# Altium PCB PCB1.PcbDoc
Units mm, origin at the board's own origin, x right, y up, seen from the top; angles counter-clockwise.
Board outline 35 x 35 mm, 4 copper layers (Top Layer, POWER, GND, Bottom Layer), stack 0.603 mm thick; 9 components, 5 nets, 86 pads, 0 vias.
Unrouted connection lines stored in the file: 17.
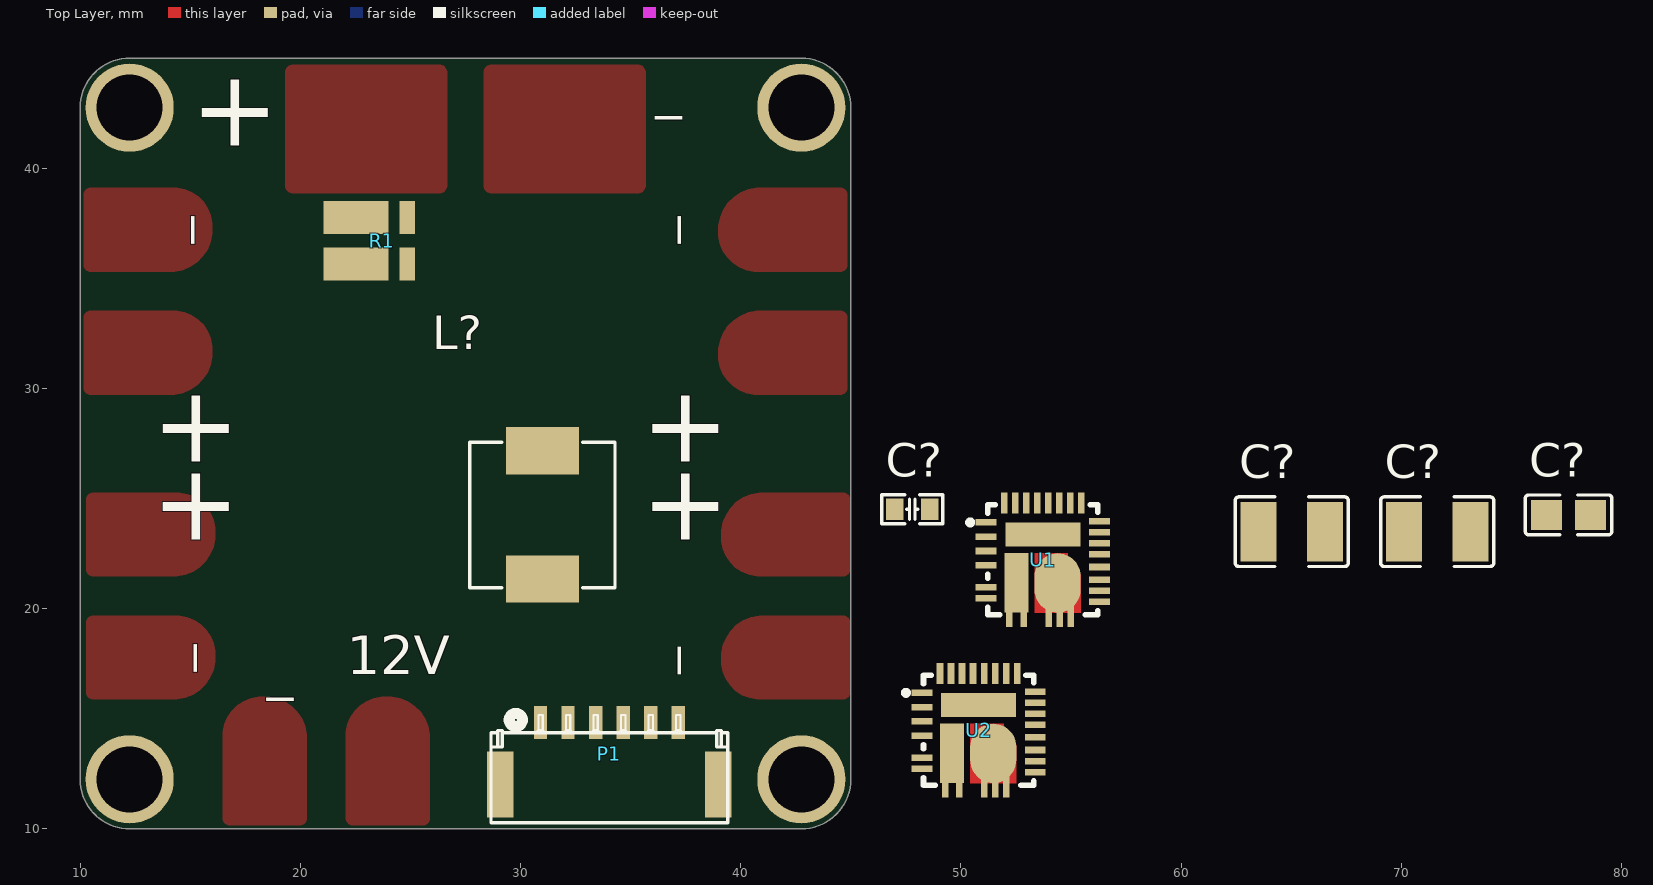
[diagram p0: Top Layer view]
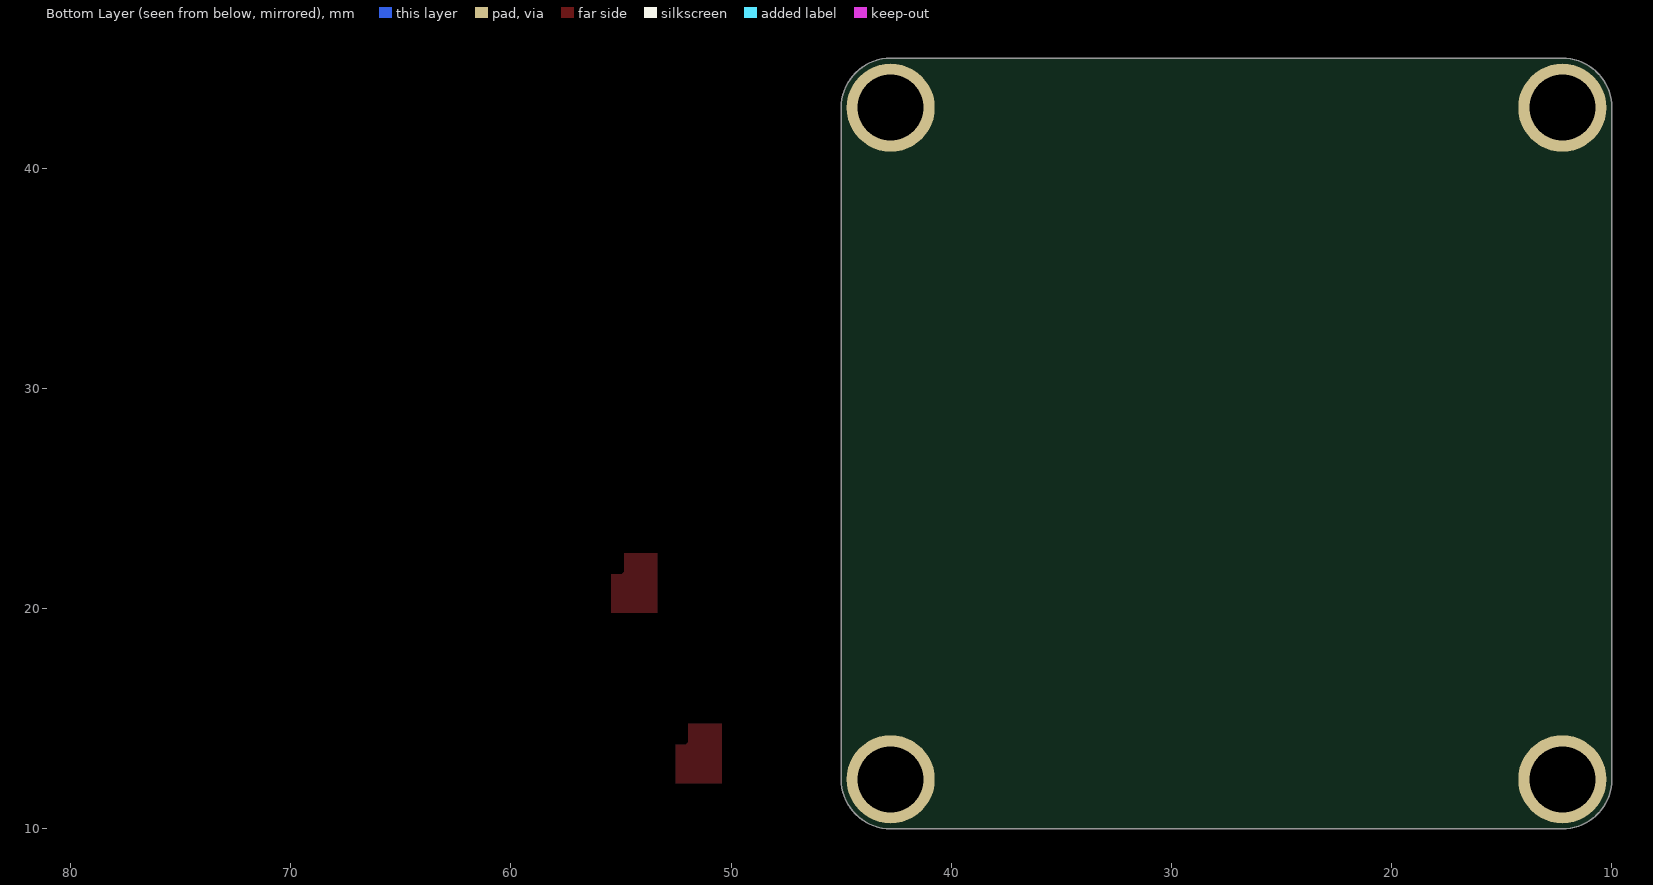
[diagram p1: Bottom Layer view, seen from below]

## Layer stack, top to bottom
Top Solder: solder mask 0.0102, Solder Resist, Dk 3.5
Top Layer: signal copper 0.0356
Dielectric 2: prepreg 0.0711, PP-006, Dk 4.1
POWER: signal copper 0.035
Dielectric 1: dielectric 0.32, FR-4, Dk 4.8
GND: signal copper 0.035
Dielectric 3: prepreg 0.0711, PP-006, Dk 4.1
Bottom Layer: signal copper 0.0356
Bottom Solder: solder mask 0.0102, Solder Resist, Dk 3.5

## Board outline
12.25,10 cw(c12.25,12.25) 10,12.25 10,42.75 cw(c12.25,42.75) 12.25,45 42.75,45 cw(c42.75,42.75) 45,42.75 45,12.25 cw(c42.75,12.25) 42.75,10

## Design rules (kind name [scope] priority, off if disabled: settings)
Clearance [All] p1: gap=0.254 ignorepadtopadclearanceinfootprint=FALSE except(0: Arc-Hole Track-Hole SMDPad-Hole THPad-Hole Via-Hole Fill-Hole Poly-Hole Region-Hole Text-Hole)
PolygonConnect [All] p1: connectstyle=Relief reliefconductorwidth=0.254 reliefentries=4 polygonreliefangle="90 Angle" airgapwidth=0.254
RoutingVias [All] p1: holewidth=0.711 width=1.27 viastyle="Through Hole" minholewidth=0.711 minwidth=1.27 maxholewidth=0.711 maxwidth=1.27
SolderMaskExpansion [All] p1: expansion=0.102 istentingtop=FALSE
Width [All] p1: maxlimit=0.254 minlimit=0.254 preferedwidth=0.254
30 further rules are at their usual default settings.

## Classes and differential pairs
component class Sheet1: C? L? P1 R1 U1 U2

## Components (designator, comment, footprint, x,y, rotation, side; value= is the part's Value field where it differs from the comment)
C? "50V/4.7uF" "C 0603_M" 46.99,24.511 r0 top
C? "100V/47uF" "C 1210" 65.024,23.495 r0 top
C? "100V/47uF" "C 1210" 71.628,23.495 r0 top
C? "100V/100nF" "C 0805" 77.597,24.257 r0 top
L? "3.3uH/6A" IND-SMD_L7.1-W6.6 30.988,24.257 r90 top
P1 "Header 6" BM06B-GHS-TBT 34.036,12.319 r180 top
R1 "R" R1216 24.003,36.703 r270 top
U1 "SIC461ED-T1-GE3" MLP55-27_L5.0-W5.0-P0.50-TL_SIC46XXX 53.721,22.218 r0 top
U2 "SIC461ED-T1-GE3" MLP55-27_L5.0-W5.0-P0.50-TL_SIC46XXX 50.8,14.478 r0 top

## Footprints (in the part's own frame and the unit in brackets; to place one, negate y for a bottom-side part, rotate by r counter-clockwise, add the part's x,y. Pads: shape width x height; smd on the part's side, far side on the other; paste and mask are expansions set on the pad)
BM06B-GHS-TBT [mm] "A1257WR-S-6P"
  rect 1.2x3 smd: 0(-4.95,0.3) 0(4.95,0.3)
  rect 0.6x1.5 smd: 1(3.125,-2.5) 2(1.875,-2.5) 3(0.625,-2.5) 4(-0.625,-2.5) 5(-1.875,-2.5) 6(-3.125,-2.5)
  silkscreen extent -5.38,-2.93 5.37,2.05, body extent -5.38,-2.8 5.37,2.1, height 4.4
"C 0603_M" [mm] "无极性贴片电容"
  rect 0.8x0.965 smd: 1(0,0) 2(1.6,0)
  silkscreen extent -0.58,-0.66 2.18,0.66, body extent -0.01,-0.41 1.59,0.41, height 0.81
"C 0805" [mm]
  rect 1.41x1.35 smd paste-100 mask+0.051: 1(-1,0) 2(1,0)
  silkscreen extent -1.96,-0.9 1.96,0.9, body extent -1,-0.65 1,0.65, height 1.29
"C 1210" [mm]
  rect 1.635x2.7 smd paste-100 mask+0.051: 1(-1.517,0) 2(1.517,0)
  silkscreen extent -2.56,-1.58 2.56,1.58, body extent -1.6,-1.26 1.6,1.26, height 0.96
IND-SMD_L7.1-W6.6 [mm]
  rect 2.15x3.32 smd: 1(-2.913,0) 2(2.913,0)
  silkscreen extent -3.3,-3.3 3.3,3.3, body extent -3.46,-3.3 3.54,3.4, height 3.1
MLP55-27_L5.0-W5.0-P0.50-TL_SIC46XXX [mm]
  rect 0.95x0.3 smd paste-100 mask+0.05: 1(-2.575,1.7) 2(-2.575,1.05) 3(-2.575,0.4) 4(-2.575,-0.25) 5(-2.575,-1.25) 6(-2.575,-1.75) 12(2.575,-1.9) 13(2.575,-1.4) 14(2.575,-0.9) 15(2.575,-0.325) 16(2.575,0.25) 17(2.575,0.75) 18(2.575,1.25) 19(2.575,1.75)
  rect 0.3x0.95 smd paste-100 mask+0.05: 7(-1.52,-2.575) 8(-0.87,-2.575) 9(0.26,-2.575) 10(0.76,-2.575) 11(1.26,-2.575) 20(1.75,2.575) 21(1.25,2.575) 22(0.75,2.575) 23(0.25,2.575) 24(-0.25,2.575) 25(-0.75,2.575) 26(-1.25,2.575) 27(-1.75,2.575)
  rect 3.4x1.1 smd paste-100 mask+0.05: 28(0,1.15)
  rect 1.1x2.7 smd paste-100 mask+0.05: 29(-1.2,-1.05)
  oval 2.1x2.7 smd: 30(0.67,-1.05)
  Top Layer region: -0.37,0.3 1.14,0.3 1.14,-0.55 1.25,-0.66 1.72,-0.66 1.72,-2.4 -0.38,-2.4 -0.37,0.3
  silkscreen extent -3.4,-2.5 2.5,2.5, body extent -2.51,-2.51 2.51,2.51, height 0.75
R1216 [mm] "HoBB1216-5W-0.25-1% C17701555"
  rect 1.5x0.7 smd: 1(-1.05,0.85) 2(1.05,0.85)
  rect 1.5x2.95 smd: 1(-1.05,-1.475) 2(1.05,-1.475)

## Part data
C? C? C? C?: library part C
L?: library part L, "INDUCTOR"
P1: library part "P SM06B", "Header, 6-Pin", LatestRevisionDate=17-Jul-2002, LatestRevisionNote="Re-released for DXP Platform.", Publisher="Altium Limited"
R1: "贴片电阻HoBB1216-5W-0.25-1% / C17701555", BOM名称=贴片电阻, 学习资源=https://lmdzstyle.taobao.com/, 版权归属=黎明电子style
U1: library part "U SIC461ED-T1-GE3", "5V output", Input Voltage=4.5V~60V, JLCPCB Part Class="Extended Part", LCSC Part Name="降压型 Vin=4.5V~60V Vout=800mV~55.2V 10A", Manufacturer=VISHAY(威世), Operating Temperature=-40℃~+125℃@(TJ), Output Current (Max)=10A, Output Voltage=800mV~55.2V, Switching Frequency=2MHz, Add into BOM=yes, Convert to PCB=yes, Datasheet=https://atta.szlcsc.com/upload/public/pdf/source/20200324/C499531_C16045847F4DF0303B2652BC26370E16.pdf, Device=SIC461ED-T1-GE3, Function=降压型, Manufacturer Part=SIC461ED-T1-GE3, Name=SIC461ED-T1-GE3, Number of Outputs=1, Output Type=可调, Supplier=LCSC, Supplier Footprint=MLP55-27L(5x5), Supplier Part=C499531, Symbol=SIC461ED-T1-GE3, Synchronous Rectification=是, Topology=降压式
U2: library part "U SIC461ED-T1-GE3", Input Voltage=4.5V~60V, JLCPCB Part Class="Extended Part", LCSC Part Name="降压型 Vin=4.5V~60V Vout=800mV~55.2V 10A", Manufacturer=VISHAY(威世), Operating Temperature=-40℃~+125℃@(TJ), Output Current (Max)=10A, Output Voltage=800mV~55.2V, Switching Frequency=2MHz, Add into BOM=yes, Convert to PCB=yes, Datasheet=https://atta.szlcsc.com/upload/public/pdf/source/20200324/C499531_C16045847F4DF0303B2652BC26370E16.pdf, Device=SIC461ED-T1-GE3, Function=降压型, Manufacturer Part=SIC461ED-T1-GE3, Name=SIC461ED-T1-GE3, Number of Outputs=1, Output Type=可调, Supplier=LCSC, Supplier Footprint=MLP55-27L(5x5), Supplier Part=C499531, Symbol=SIC461ED-T1-GE3, Synchronous Rectification=是, Topology=降压式

## Free pads (board coordinates)
  round 4 hole 3: 0(12.25,12.25) 0(12.25,42.75) 0(42.75,12.25) 0(42.75,42.75)

## Nets (pads, with @x,y where several pads share a name; then routed paths per layer and width w, separated by ;. In a path a pad name is that pad's centre, name@x,y a point inside that pad or via, vN(x,y) a via of type N, cw(c..) or ccw(c..) an arc to the next point about the centre after c; other vN are vias at no path point)
GND: C?.1@46.99,24.511 C?.1@76.597,24.257 C?.2@66.541,23.495 C?.2@73.145,23.495 U1.9 U1.10 U1.11 U1.17 U1.28 U1.30
NetC?_2: C?.2@48.59,24.511 U1.16
NetL?_2: L?.2 U1.12 U1.13 U1.14
VCC: C?.1@63.507,23.495 C?.1@70.111,23.495 C?.2@78.597,24.257 R1.2 U1.1 U1.7 U1.8 U1.29
VCCIN: R1.1
pads on no net: L?.1 P1.0 P1.1 P1.2 P1.3 P1.4 P1.5 P1.6 U1.2 U1.3 U1.4 U1.5 U1.6 U1.15 U1.18 U1.19 U1.20 U1.21 U1.22 U1.23 U1.24 U1.25 U1.26 U1.27 U2.1 U2.2 U2.3 U2.4 U2.5 U2.6 U2.7 U2.8 U2.9 U2.10 U2.11 U2.12 U2.13 U2.14 U2.15 U2.16 U2.17 U2.18 U2.19 U2.20 U2.21 U2.22 U2.23 U2.24 U2.25 U2.26 U2.27 U2.28 U2.29 U2.30

## Polygon pours and split planes (outlines as drawn)
no net on Top Layer "NONET_L01_P018" (solid, pour order 18): 16.485,10.465 ccw(c16.79,10.465) 16.79,10.16 19.989,10.16 ccw(c19.989,10.465) 20.295,10.465 20.295,14.097 ccw(c18.39,14.097) 18.39,16.002 18.263,16.002 ccw(c18.263,14.224) 16.485,14.224
no net on Top Layer "NONET_L01_P019" (solid, pour order 19): 22.073,10.465 ccw(c22.378,10.465) 22.378,10.16 25.577,10.16 ccw(c25.577,10.465) 25.883,10.465 25.883,14.097 ccw(c23.978,14.097) 23.978,16.002 23.851,16.002 ccw(c23.851,14.224) 22.073,14.224
no net on Top Layer "NONET_L01_P023" (solid, pour order 23): 44.526,35.306 ccw(c44.526,35.611) 44.831,35.611 44.831,38.811 ccw(c44.526,38.811) 44.526,39.116 40.894,39.116 ccw(c40.894,37.211) 38.989,37.211 38.989,37.084 ccw(c40.767,37.084) 40.767,35.306
no net on Top Layer "NONET_L01_P022" (solid, pour order 22): 44.526,29.718 ccw(c44.526,30.023) 44.831,30.023 44.831,33.223 ccw(c44.526,33.223) 44.526,33.528 40.894,33.528 ccw(c40.894,31.623) 38.989,31.623 38.989,31.496 ccw(c40.767,31.496) 40.767,29.718
no net on Top Layer "NONET_L01_P021" (solid, pour order 21): 44.653,21.463 ccw(c44.653,21.768) 44.958,21.768 44.958,24.968 ccw(c44.653,24.968) 44.653,25.273 41.021,25.273 ccw(c41.021,23.368) 39.116,23.368 39.116,23.241 ccw(c40.894,23.241) 40.894,21.463
no net on Top Layer "NONET_L01_P020" (solid, pour order 20): 44.653,15.875 ccw(c44.653,16.18) 44.958,16.18 44.958,19.38 ccw(c44.653,19.38) 44.653,19.685 41.021,19.685 ccw(c41.021,17.78) 39.116,17.78 39.116,17.653 ccw(c40.894,17.653) 40.894,15.875
no net on Top Layer "NONET_L01_P017" (solid, pour order 17): 10.592,19.685 ccw(c10.592,19.38) 10.287,19.38 10.287,16.18 ccw(c10.592,16.18) 10.592,15.875 14.224,15.875 ccw(c14.224,17.78) 16.129,17.78 16.129,17.907 ccw(c14.351,17.907) 14.351,19.685
no net on Top Layer "NONET_L01_P016" (solid, pour order 16): 10.592,25.273 ccw(c10.592,24.968) 10.287,24.968 10.287,21.768 ccw(c10.592,21.768) 10.592,21.463 14.224,21.463 ccw(c14.224,23.368) 16.129,23.368 16.129,23.495 ccw(c14.351,23.495) 14.351,25.273
no net on Top Layer "NONET_L01_P015" (solid, pour order 15): 10.465,33.528 ccw(c10.465,33.223) 10.16,33.223 10.16,30.023 ccw(c10.465,30.023) 10.465,29.718 14.097,29.718 ccw(c14.097,31.623) 16.002,31.623 16.002,31.75 ccw(c14.224,31.75) 14.224,33.528
no net on Top Layer "NONET_L01_P014" (solid, pour order 14): 10.465,39.116 ccw(c10.465,38.811) 10.16,38.811 10.16,35.611 ccw(c10.465,35.611) 10.465,35.306 14.097,35.306 ccw(c14.097,37.211) 16.002,37.211 16.002,37.338 ccw(c14.224,37.338) 14.224,39.116
no net on Top Layer "NONET_L01_P013" (solid, pour order 13): 35.306,44.704 cw(c35.306,44.323) 35.687,44.323 35.687,39.243 cw(c35.306,39.243) 35.306,38.862 28.702,38.862 cw(c28.702,39.243) 28.321,39.243 28.321,44.323 cw(c28.702,44.323) 28.702,44.704
no net on Top Layer "NONET_L01_P012" (solid, pour order 12): 26.289,44.704 cw(c26.289,44.323) 26.67,44.323 26.67,39.243 cw(c26.289,39.243) 26.289,38.862 19.685,38.862 cw(c19.685,39.243) 19.304,39.243 19.304,44.323 cw(c19.685,44.323) 19.685,44.704
no net on Top Solder "NONET_L01_P019" (solid): 22.073,10.465 ccw(c22.378,10.465) 22.378,10.16 25.577,10.16 ccw(c25.577,10.465) 25.883,10.465 25.883,14.097 ccw(c23.978,14.097) 23.978,16.002 23.851,16.002 ccw(c23.851,14.224) 22.073,14.224
no net on Top Solder "NONET_L01_P018" (solid): 16.485,10.465 ccw(c16.79,10.465) 16.79,10.16 19.989,10.16 ccw(c19.989,10.465) 20.295,10.465 20.295,14.097 ccw(c18.39,14.097) 18.39,16.002 18.263,16.002 ccw(c18.263,14.224) 16.485,14.224
no net on Top Solder "NONET_L01_P023" (solid): 44.526,35.306 ccw(c44.526,35.611) 44.831,35.611 44.831,38.811 ccw(c44.526,38.811) 44.526,39.116 40.894,39.116 ccw(c40.894,37.211) 38.989,37.211 38.989,37.084 ccw(c40.767,37.084) 40.767,35.306
no net on Top Solder "NONET_L01_P022" (solid): 44.526,29.718 ccw(c44.526,30.023) 44.831,30.023 44.831,33.223 ccw(c44.526,33.223) 44.526,33.528 40.894,33.528 ccw(c40.894,31.623) 38.989,31.623 38.989,31.496 ccw(c40.767,31.496) 40.767,29.718
no net on Top Solder "NONET_L01_P021" (solid): 44.653,21.463 ccw(c44.653,21.768) 44.958,21.768 44.958,24.968 ccw(c44.653,24.968) 44.653,25.273 41.021,25.273 ccw(c41.021,23.368) 39.116,23.368 39.116,23.241 ccw(c40.894,23.241) 40.894,21.463
no net on Top Solder "NONET_L01_P020" (solid): 44.653,15.875 ccw(c44.653,16.18) 44.958,16.18 44.958,19.38 ccw(c44.653,19.38) 44.653,19.685 41.021,19.685 ccw(c41.021,17.78) 39.116,17.78 39.116,17.653 ccw(c40.894,17.653) 40.894,15.875
no net on Top Solder "NONET_L01_P017" (solid): 10.592,19.685 ccw(c10.592,19.38) 10.287,19.38 10.287,16.18 ccw(c10.592,16.18) 10.592,15.875 14.224,15.875 ccw(c14.224,17.78) 16.129,17.78 16.129,17.907 ccw(c14.351,17.907) 14.351,19.685
no net on Top Solder "NONET_L01_P016" (solid): 10.592,25.273 ccw(c10.592,24.968) 10.287,24.968 10.287,21.768 ccw(c10.592,21.768) 10.592,21.463 14.224,21.463 ccw(c14.224,23.368) 16.129,23.368 16.129,23.495 ccw(c14.351,23.495) 14.351,25.273
no net on Top Solder "NONET_L01_P015" (solid): 10.465,33.528 ccw(c10.465,33.223) 10.16,33.223 10.16,30.023 ccw(c10.465,30.023) 10.465,29.718 14.097,29.718 ccw(c14.097,31.623) 16.002,31.623 16.002,31.75 ccw(c14.224,31.75) 14.224,33.528
no net on Top Solder "NONET_L01_P014" (solid): 10.465,39.116 ccw(c10.465,38.811) 10.16,38.811 10.16,35.611 ccw(c10.465,35.611) 10.465,35.306 14.097,35.306 ccw(c14.097,37.211) 16.002,37.211 16.002,37.338 ccw(c14.224,37.338) 14.224,39.116
no net on Top Solder "NONET_L01_P013" (solid): 35.306,44.704 cw(c35.306,44.323) 35.687,44.323 35.687,39.243 cw(c35.306,39.243) 35.306,38.862 28.702,38.862 cw(c28.702,39.243) 28.321,39.243 28.321,44.323 cw(c28.702,44.323) 28.702,44.704
no net on Top Solder "NONET_L01_P012" (solid): 26.289,44.704 cw(c26.289,44.323) 26.67,44.323 26.67,39.243 cw(c26.289,39.243) 26.289,38.862 19.685,38.862 cw(c19.685,39.243) 19.304,39.243 19.304,44.323 cw(c19.685,44.323) 19.685,44.704

## Silkscreen, mask and mechanical layers (free items; w line width, h text height)
Top Overlay:
  text "+" at 19.05,45.184 h6 r180
  text "-" at 37.592,44.621 h6 r180
  text "-" at 17.443,36.322 h6 r90
  text "-" at 39.541,36.322 h6 r90
  text "+" at 17.272,30.833 h6 r180
  text "+" at 39.497,30.833 h6 r180
  text "+" at 17.272,27.277 h6 r180
  text "+" at 39.497,27.277 h6 r180
  text "-" at 19.939,18.205 h6 r180
  text "-" at 17.57,16.891 h6 r90
  text "-" at 39.541,16.764 h6 r90
  text "12V" at 22.098,16.434 h3
Mechanical 1:
  the board outline again, w0.127

## Dimensions
42.75,45 to 42.75,10 on Mechanical 1
12.25,42.75 to 42.75,42.75 on Mechanical 1